# EAGLE board Blimp_nicla_standalone_IC (EAGLE 9.7.0)
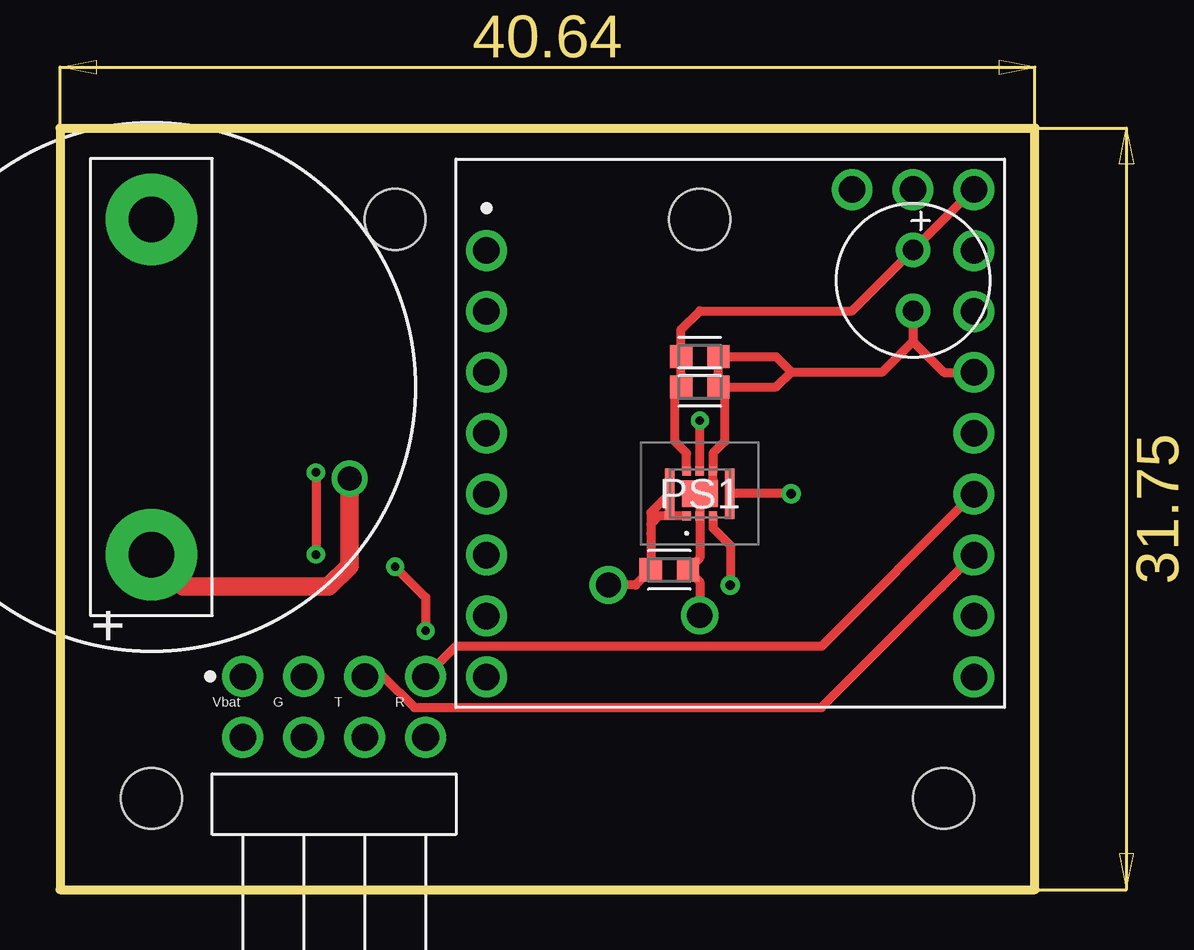
[diagram p0: board, top side]
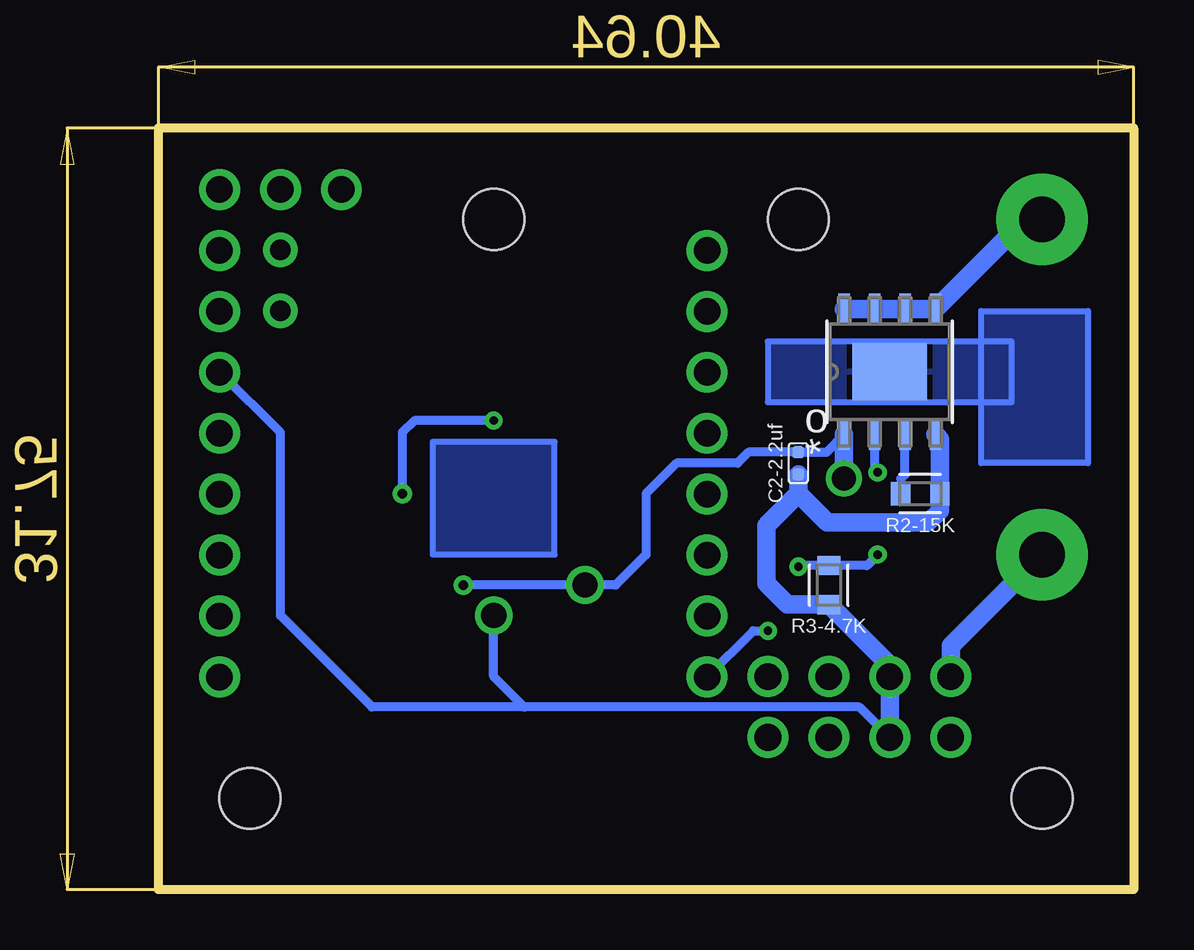
[diagram p1: board, bottom side, seen from below]

Size 40.64 x 31.75 mm. Coordinates in mm from the lower left corner, seen from the top.
Outline: 0,31.75 40.64,31.75 40.64,0 0,0 0,31.75
Copper layers (1*16): Top 0.035mm / dielectric 1.5mm / Bottom 0.035mm
Design rules "Fusion Electronics Design Rules": minimum track width 10mil, minimum drill 6mil, track to track 6mil, track to pad 6mil, pad to pad 6mil, via to via 6mil, smd to smd 0mil, copper to edge 50mil, drill to drill 6mil, minimum pad ring 10mil, minimum via ring 8mil, stop-mask expansion 4mil, vias tented up to drill 0mil, thermal gap 10mil
Holes 2.54 mm at 13.97,27.94 26.67,27.94 3.81,3.81 36.83,3.81

## Footprints (pad centres in the part's own frame; a part is rotated, then mirrored left to right if it is on the bottom)
CAPC1608X85 = smd 0.921 x 0.97: 1 -0.775,0; 2 0.775,0
C0402 = smd 0.5 x 0.5: 1 0,0.463; 2 0,-0.463
UV_LIGHT = drill 1.9 pad 3.81: 1 13.97,0; 2 0,0
MYRBP500080W21RD = smd 0.35 x 0.375: 1 -0.55,-0.938; 2 0,-0.938; 3 0.55,-0.938; 4 0.55,0.938; 5 0,0.938; 6 -0.55,0.938 | smd 0.4 x 2.1: 7 -1.25,0; 8 1.25,0 | smd 1.5 x 1.1: 9 0,0
RESC1608X60 = smd 0.799 x 0.974: 1 -0.815,0; 2 0.815,0
SOIC-8_ME_MCH-L = smd 1.257 x 0.483: 1 -2.623,1.905; 2 -2.623,0.635; 3 -2.623,-0.635; 4 -2.623,-1.905; 5 2.623,-1.905; 6 2.623,-0.635; 7 2.623,0.635; 8 2.623,1.905 | smd 2.413 x 3.099: EPAD 0,0
ESP_NICLA_4X2PIN_CONNECTOR_MALE_ON_NICLA = drill 1.105 pad 1.705: 1 0,0; 2 2.54,0; 3 5.08,0; 4 7.62,0; 5 7.62,-2.54; 6 5.08,-2.54; 7 2.54,-2.54; 8 0,-2.54
CAP = drill 0.85 pad 1.45: 1 -1.27,0; 2 1.27,0
NICLA_FULL = drill 1.105 pad 1.705: 5VIN 20.32,0; A0 0,-2.54; A1 0,-5.08; A2 0,-17.78; CIPO 0,-10.16; COPI 0,-12.7; CS 0,-15.24; GND 20.32,-7.62; IO0 0,-20.32; IO3 20.32,-10.16; NC 20.32,-2.54; NTC 17.78,0; RX 20.32,-12.7; SCL 20.32,-17.78; SCLK 0,-7.62; SDA 20.32,-20.32; TX 20.32,-15.24; VB 15.24,0; VDDIO 20.32,-5.08

## Placement (x,y rotation side)
C1  10V 10uf  [CAPC1608X85]  25.4,13.33 0 top
C2  6.3V 10uf  [CAPC1608X85]  26.67,22.22 0 top
C2-2.2U  2.2uf  [C0402]  13.97,17.78 0 bottom
C3  6.3V 10uf  [CAPC1608X85]  26.67,20.95 0 top
IR_LED1  UV_LIGHT  [UV_LIGHT]  3.81,27.94 270 top
PS1  MYRBP500080W21RD  [MYRBP500080W21RD]  26.67,16.51 0 top
R2-15K  15k  [RESC1608X60]  8.89,16.51 0 bottom
R3-4.7K  4.7k  [RESC1608X60]  12.7,12.7 270 bottom
U1  MIC4802YME-TRSOIC-8_ME_MCH-L  [SOIC-8_ME_MCH-L]  10.16,21.59 90 bottom
U$6  NICLA_ESP_4PIN_CONNECTOR_MALE_ON_NICLA  [ESP_NICLA_4X2PIN_CONNECTOR_MALE_ON_NICLA]  7.62,8.89 0 top
U$9  CUSTOM_C  [CAP]  35.56,25.4 270 top
U$15  NICLAVISION  [NICLA_FULL]  17.78,29.19 0 top

## Library data of the parts
C1-C3 = Capacitor; CATEGORY: Capacitor
C2-2.2U = OPL_Capacitor; MPN: CC0402JRNPO9BN101
IR_LED1 = IMU_adaf
PS1 = MYRBP500080W21RD; DESCRIPTION: Non-Isolated DC/DC Converters; HEIGHT: 1.04mm; MANUFACTURER_NAME: Murata Electronics; MANUFACTURER_PART_NUMBER: MYRBP500080W21RD; MOUSER_PART_NUMBER: 81-MYRBP500080W21RD; MOUSER_PRICE-STOCK: https://www.mouser.co.uk/ProductDetail/Murata-Electronics/MYRBP500080W21RD?qs=hd1VzrDQEGh%2Fg85ihM7iTw%3D%3D
R2-15K R3-4.7K = Resistor; CATEGORY: Resistor; SUB-CATEGORY: Fixed
U1 = MIC4802-YME-TR; COPYRIGHT: Copyright (C) 2024 Ultra Librarian. All rights reserved.; MANUFACTURER_PART_NUMBER: MIC4802YME-TR; MFR_NAME: Microchip
U$6 = NICLA_ESP_4PIN_CONNECTOR
U$9 = Electronics_Lib
U$15 = nicla_vision

## Nets
EPAD: U1.EPAD
GNDN: C1.2 C2-2.2U.2 C2.2 C3.2 PS1.2 PS1.4 PS1.9 R2-15K.2 R3-4.7K.2 U1.4 U$6.2 U$6.7 U$9.2 U$15.GND
N$1: IR_LED1.2 U1.5 U1.6 U1.7 U1.8
N$2: R2-15K.1 U1.3
N$3: PS1.5 PS1.8
NCL_RX: U$6.4 U$15.RX
NCL_TX: U$6.3 U$15.TX
SIG_LED: R3-4.7K.1 U1.2 U$15.IO0
VB: U$15.VB
VCCN3: C1.1 C2-2.2U.1 IR_LED1.1 PS1.1 PS1.3 PS1.7 U1.1 U$6.1
VCCN5: C2.1 C3.1 PS1.6 U$9.1 U$15.5VIN
VDDIO: U$15.VDDIO

## Tracks (layer width: path | path; a pad name or v marks a point on that pad's centre or on a via)
EPAD
  Bottom 0.254: 5.08,22.86 15.24,22.86 15.24,20.32 5.08,20.32 5.08,22.86 | 6.35,24.13 1.91,24.13 1.91,17.78 6.35,17.78 6.35,24.13
  pour Bottom: 5.21,20.45 15.11,20.45 15.11,22.73 5.21,22.73
  pour Bottom: 2.03,17.91 6.22,17.91 6.22,24 2.03,24
GNDN  (via drill 1.05)
  Top 0.381: 35.56,22.86 36.85,21.57 U$15.GND | U$9.2 35.56,22.86 | C3.2 27.7,20.7 27.7,18.68 27.22,18.2 PS1.4 27.22,17.06 PS1.9 PS1.2 26.67,13.83 C1.2 26.67,12.84 v26.67,11.43 | C3.2 C2.2 29.84,22.22 30.48,21.59 | C3.2 29.84,20.95 30.48,21.59 | 30.48,21.59 34.29,21.59 35.56,22.86
  Bottom 0.381: 25.4,7.62 11.43,7.62 U$6.7 | 25.4,7.62 31.75,7.62 35.56,11.43 35.56,19.05 38.08,21.57 U$15.GND | v26.67,11.43 26.67,8.89 25.4,7.62
  Bottom 0.762: 13.97,16.51 C2-2.2U.2 | 13.97,16.51 12.76,15.3 8.56,15.3 8.08,15.79 R2-15K.2 8.08,18.79 U1.4 | 13.97,16.51 15.3,15.18 15.3,12.76 14.42,11.88 R3-4.7K.2 10.16,9.34 U$6.2 U$6.7
N$1
  Bottom 0.762: U1.8 U1.7 U1.6 U1.5 4.53,27.94 IR_LED1.2
N$2
  Bottom 0.381: U1.3 9.52,17.31 9.7,17.13 R2-15K.1
N$3  (via drill 0.35, 0.4)
  Top 0.381: v30.48,16.51 PS1.8 | PS1.5 v26.67,19.56
  Bottom 0.381: v26.67,19.56 29.97,19.56 30.48,19.05 v30.48,16.51
N$4
  Bottom 0.254: 24.13,18.67 29.21,18.67 29.21,13.97 24.13,13.97 24.13,18.67
  pour Bottom: 24.26,14.1 29.08,14.1 29.08,18.54 24.26,18.54
NCL_RX
  Top 0.381: U$15.RX 38.08,16.49 31.75,10.16 29.21,10.16 16.51,10.16 U$6.4
NCL_TX
  Top 0.381: U$6.3 13.48,8.89 14.77,7.6 31.75,7.6 U$15.TX
SIG_LED  (via drill 0.35)
  Top 0.381: v10.67,17.4 v10.67,13.97 | v13.97,13.46 15.24,12.19 v15.24,10.8
  Bottom 0.381: U1.2 10.8,17.53 v10.67,17.4 | v10.67,13.97 11.12,13.52 R3-4.7K.1 13.92,13.52 v13.97,13.46 | U$15.IO0 15.85,10.8 v15.24,10.8
VCCN3  (via drill 0.4, 1, 1.05)
  Top 0.381: C1.1 23.99,12.7 v22.86,12.7 | PS1.7 24.62,15.72 24.62,15.24 | 24.62,15.24 C1.1 | PS1.3 27.22,15.07 27.94,14.35 v27.94,12.7 | 24.62,14.85 C1.1 | PS1.1 24.96,15.57 24.62,15.24
  Top 0.762: IR_LED1.1 5.14,12.64 11.2,12.64 12.06,13.5 v12.06,17.14
  Bottom 0.381: U1.1 12.79,18.24 C2-2.2U.1 16.05,18.24 16.51,17.78 19.05,17.78 20.32,16.51 20.32,13.97 21.59,12.7 v22.86,12.7 v27.94,12.7
  Bottom 0.762: U1.1 v12.06,17.14 | U$6.1 7.62,10.16 IR_LED1.1
VCCN5
  Top 0.381: U$15.5VIN 38.08,29.19 U$9.1 33.02,24.13 26.67,24.13 25.89,23.36 C2.1 C3.1 25.64,20.7 25.64,18.68 26.12,18.2 PS1.6

## Text on the board
tNames: +
bNames: o | C2-2.2uf